# Altium PCB Game_Boy_Reverse_Engineering_For_Link_Port.PcbDoc
Units mm, origin at the board's own origin, x right, y up, seen from the top; angles counter-clockwise.
Board outline 8.5 x 20 mm, 2 copper layers (Top, Bottom), stack 1.071 mm thick; 1 components, 6 nets, 22 pads, 0 vias.
Unrouted connection lines stored in the file: 2.
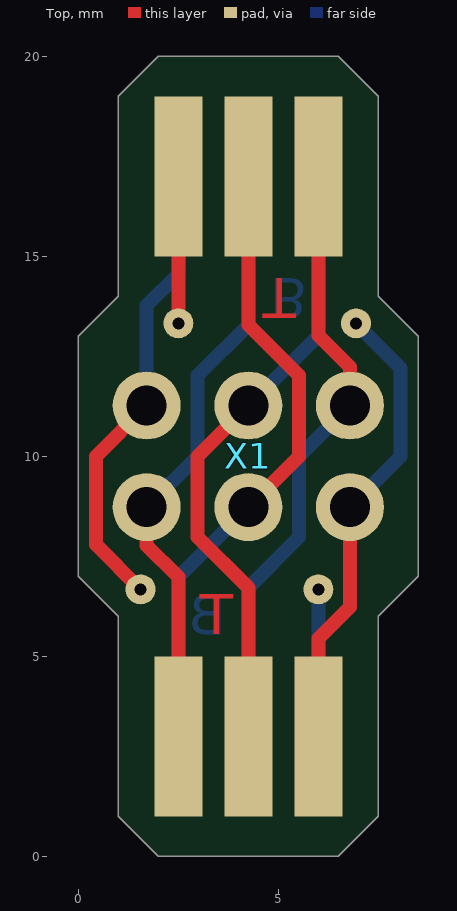
[diagram p0: Top view]
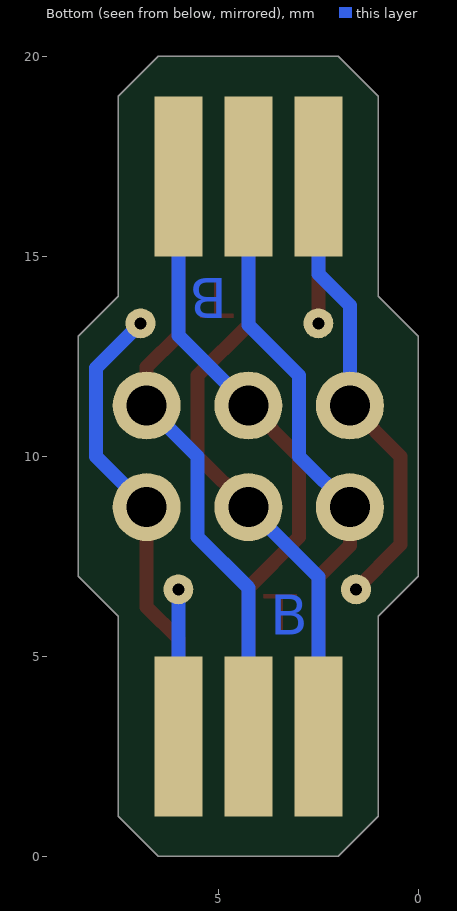
[diagram p1: Bottom view, seen from below]

## Layer stack, top to bottom
Top Solder: solder mask 0.0102, Solder Resist, Dk 3.5
Top: signal copper 0.0356
Dielectric1: core 1, FR-4, Dk 4.8
Bottom: signal copper 0.0356
Bottom Solder: solder mask 0.0102, Solder Resist, Dk 3.5

## Board outline
1,1 1,6 0,7 0,13 1,14 1,19 2,20 6.5,20 7.5,19 7.5,14 8.5,13 8.5,7 7.5,6 7.5,1 6.5,0 2,0

## Design rules (kind name [scope] priority, off if disabled: settings)
Clearance Clearance_1 [InPolygon] p1: gap=1
Clearance [All] p2: gap=0.05
PolygonConnect [All] p1: connectstyle=Relief reliefconductorwidth=0.254 reliefentries=4 polygonreliefangle="90 Angle" airgapwidth=0.254
RoomDefinition Game_Boy_Reverse_Engineering_For_Link_Port [InComponentClass('Game_Boy_Reverse_Engineering_For_Link_Port')] p1: confinementstyle=ConfineIn formatcopy=TRUE lockcomponents=FALSE outline -562.8,-163.06 -512,-163.06 -512,-137.66 -562.8,-137.66
RoutingVias [All] p1: holewidth=0.711 width=1.27 viastyle="Through Hole" minholewidth=0.711 minwidth=1.27 maxholewidth=5 maxwidth=5
SilkToSolderMaskClearance SilkscreenOverComponentPads [IsPad] p1: minsilkscreentomaskgap=0.254 clearancetoexposedcopper=TRUE
SolderMaskExpansion [All] p1: expansion=0.102
Width [All] p1: maxlimit=10 minlimit=0.254 preferedwidth=0.254
29 further rules are at their usual default settings.

## Components (designator, comment, footprint, x,y, rotation, side; value= is the part's Value field where it differs from the comment)
X1 "NAME" PLDR-6 1.71,11.27 r0 top

## Footprints (in the part's own frame and the unit in brackets; to place one, negate y for a bottom-side part, rotate by r counter-clockwise, add the part's x,y. Pads: shape width x height; smd on the part's side, far side on the other; paste and mask are expansions set on the pad)
PLDR-6 [mm]
  round 1.7 hole 1: 1(0,0) 2(2.54,0) 3(5.08,0) 4(0,-2.54) 5(2.54,-2.54) 6(5.08,-2.54)
  body extent -1.32,-12.57 6.3,-0.03, height 5.1

## Part data
X1: library part ??

## Free pads (board coordinates)
  rect 1.2x4 smd: 1(2.5,17) 1(6,3) 2(4.25,3) 2(4.25,17) 3(2.5,3) 3(6,17)
  rect 1.2x4 smd far side: 4(2.5,17) 4(6,3) 5(4.25,3) 5(4.25,17) 6(2.5,3) 6(6,17)
  round 0.75 hole 0.3: 7(1.557,6.674) 7(2.5,13.326) 7(6,6.674) 7(6.943,13.326)

## Nets (pads, with @x,y where several pads share a name; then routed paths per layer and width w, separated by ;. In a path a pad name is that pad's centre, name@x,y a point inside that pad or via, vN(x,y) a via of type N, cw(c..) or ccw(c..) an arc to the next point about the centre after c; other vN are vias at no path point)
NetX1_1: pad.4 pad.7@1.557,6.674 pad.7@6,6.674 X1.1 | length 15.3
  Top w0.35: pad.7@1.557,6.674 0.44,7.791 0.44,10 X1.1
  Bottom w0.35: X1.1 1.71,13.766 2.5,14.556 pad.4@2.5,17 ; pad.4@6,3 pad.7@6,6.674
NetX1_2: pad.2@4.25,3 pad.6@6,17 X1.2 | length 15.8
  Top w0.35: pad.2@4.25,3 4.25,6.714 2.98,7.984 2.98,10 X1.2
  Bottom w0.35: X1.2 6,13.02 pad.6@6,17
NetX1_3: pad.3@6,17 pad.5@4.25,3 X1.3 | length 15.4
  Top w0.35: pad.3@6,17 6,13.02 6.79,12.23 X1.3
  Bottom w0.35: pad.5@4.25,3 4.25,6.714 5.52,7.984 5.52,10 X1.3
NetX1_4: pad.3@2.5,3 pad.5@4.25,17 X1.4 | length 15.4
  Top w0.35: X1.4 1.71,7.77 2.5,6.98 pad.3@2.5,3
  Bottom w0.35: X1.4 2.98,10 2.98,12.016 4.25,13.286 pad.5@4.25,17
NetX1_5: pad.2@4.25,17 pad.6@2.5,3 X1.5 | length 15.8
  Top w0.35: X1.5 5.52,10 5.52,12.016 4.25,13.286 pad.2@4.25,17
  Bottom w0.35: pad.6@2.5,3 2.5,6.98 X1.5
NetX1_6: pad.1 pad.7@2.5,13.326 pad.7@6.943,13.326 X1.6 | length 15.3
  Top w0.35: pad.7@2.5,13.326 pad.1@2.5,17 ; pad.1@6,3 6,5.444 6.79,6.234 X1.6
  Bottom w0.35: X1.6 8.06,10 8.06,12.209 pad.7@6.943,13.326

## Other copper
Top:
  text "T" at 5.447,14.453 h1 r180
  text "T" at 3.03,5.546 h1
Bottom:
  text "B" at 4.781,14.451 h1 r180
  text "B" at 3.701,5.545 h1

## Silkscreen, mask and mechanical layers (free items; w line width, h text height)
Outline:
  the board outline again, w0.254